# EAGLE board Thetis_RevE1_PCB (EAGLE 9.7.0)
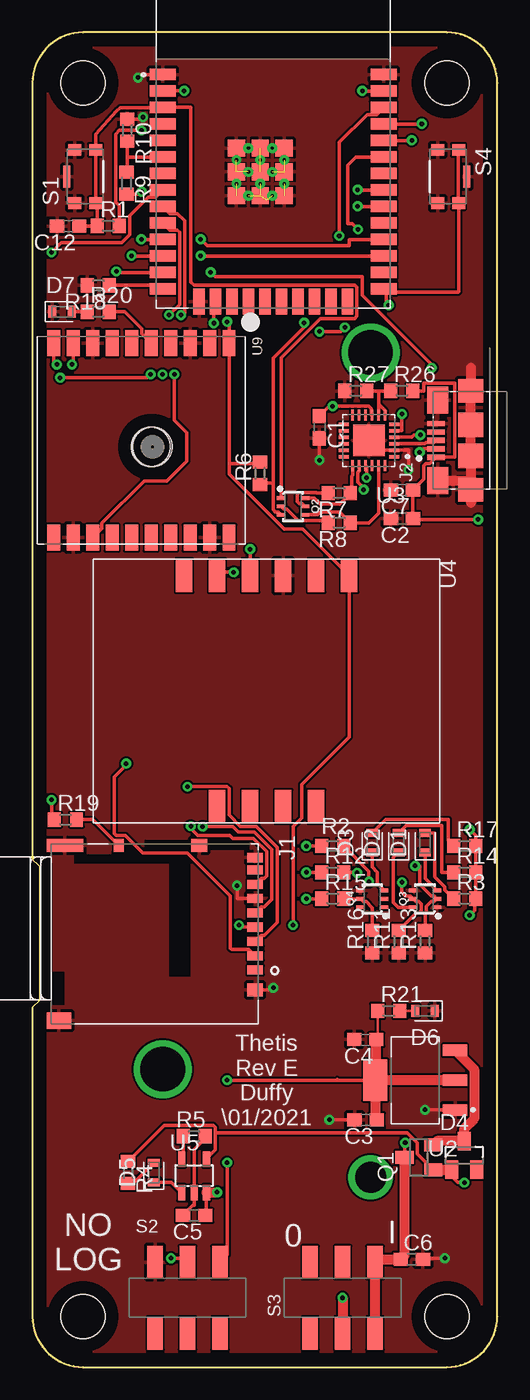
[diagram p0: board, top side]
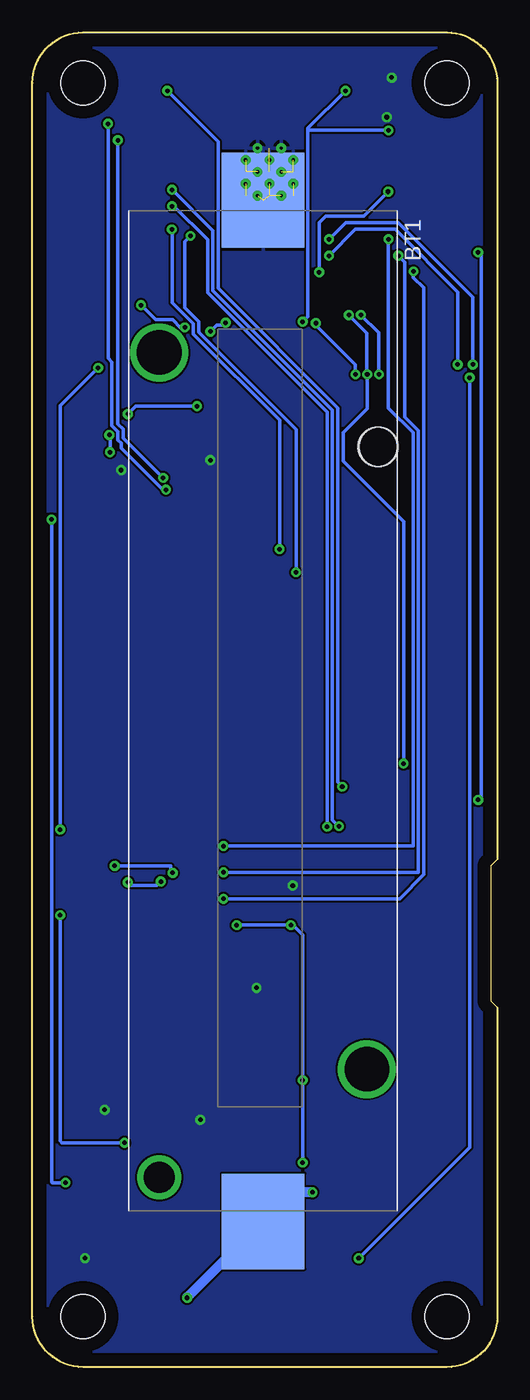
[diagram p1: board, bottom side, seen from below]

Size 35.79 x 102.79 mm. Coordinates in mm from the lower left corner, seen from the top.
Outline: 0,98.91 0,39.12 0.51,38.61 0.51,28.19 0,27.69 0,3.89 arc90 3.89,0 31.9,0 arc90 35.79,3.89 35.79,98.91 arc90 31.9,102.79 3.89,102.79 arc90 0,98.91
Copper layers (1*16): Top 0.035mm / dielectric 1.5mm / Bottom 0.035mm
Design rules "default": minimum track width 6mil, minimum drill 0.35mm, track to track 6mil, track to pad 6mil, pad to pad 6mil, via to via 6mil, smd to smd 6mil, copper to edge 40mil, drill to drill 6mil, minimum pad ring 10mil, minimum via ring 8mil, stop-mask expansion 4mil, vias tented up to drill 0mil, thermal gap 10mil
Net classes: 0 default: width 0.178 mm
Holes 3.4 mm at 3.89,3.89 31.9,3.89 3.89,98.91 31.9,98.91
Holes 3 mm at 9.12,70.87
tKeepout: area 28.7,0.7 to 35.1,7.1; area 0.7,0.7 to 7.1,7.1; area 0.7,95.7 to 7.1,102.1; area 28.7,95.7 to 35.1,102.1

## Footprints (pad centres in the part's own frame; a part is rotated, then mirrored left to right if it is on the bottom)
BAT_1042 = smd 7.35 x 6.35: + 39.33,0; - -39.33,0 | drill 3.45: P$1 -27.6,-8; P$2 27.6,8 | drill 2.39: P$3 35.93,-8
C0603 = smd 1.1 x 1: 1 -0.85,0; 2 0.85,0
LEDC1608X65N = smd 0.612 x 0.912: A 0.75,0; C -0.75,0
SOT23 = smd 1 x 1.4: 1 -0.95,-1.1; 2 0.95,-1.1; 3 0,1.1
LEDC1608X35N = smd 0.612 x 0.912: A 0.75,0; C -0.75,0
HRS_DM3AT-SF-PEJM5 = smd 0.7 x 1.2: 1 3.2,0; 2 2.1,0; 3 1,0; 4 -0.1,0; 5 -1.2,0; 6 -2.3,0; 7 -3.4,0; 8 -4.5,0; SWB -5.45,0 | smd 1 x 1.2: P1 -6.4,-4.3; P4 4.75,0 | smd 1 x 2.8: P2 -6.4,-14.65 | smd 1.3 x 1.9: P3 7.1,-15.1 | smd 1 x 0.8: SWA -6.4,-10.5
AMPHENOL_10118192-0001LF = smd 0.4 x 1.35: 1 -1.3,0; 2 -0.65,0; 3 0,0; 4 0.65,0; 5 1.3,0 | smd 2.1 x 1.6: SH1 -3.1,-0.125; SH2 3.1,-0.125 | smd 1.8 x 1.9: SH3 -3.8,-2.675; SH6 3.8,-2.675 | smd 1.9 x 1.9: SH4 -1.2,-2.675; SH5 1.2,-2.675
SC70-6 = smd 0.3 x 0.66: 1 -0.65,-0.92; 2 0,-0.92; 3 0.65,-0.92; 4 0.65,0.92; 5 0,0.92; 6 -0.65,0.92
R0603 = smd 1 x 1.1: 1 -0.85,0; 2 0.85,0
SW_KMR221GLFS = smd 0.9 x 1: 1 -2.05,0.8; 2 -2.05,-0.8; 3 2.05,-0.8; 4 2.05,0.8 | smd 1.7 x 0.55: 5 0,1.425
SW_JS202011SCQN = smd 1.2 x 2.5: 1 -2.5,-2.75; 2 0,-2.75; 3 2.5,-2.75; 4 -2.5,2.75; 5 0,2.75; 6 2.5,2.75
MODULE_ESP32-WROOM-32E_(16MB) = smd 2 x 0.9: 1 -8.5,5.26; 2 -8.5,3.99; 3 -8.5,2.72; 4 -8.5,1.45; 5 -8.5,0.18; 6 -8.5,-1.09; 7 -8.5,-2.36; 8 -8.5,-3.63; 9 -8.5,-4.9; 10 -8.5,-6.17; 11 -8.5,-7.44; 12 -8.5,-8.71; 13 -8.5,-9.98; 14 -8.5,-11.25; 25 8.5,-11.25; 26 8.5,-9.98; 27 8.5,-8.71; 28 8.5,-7.44; 29 8.5,-6.17; 30 8.5,-4.9; 31 8.5,-3.63; 32 8.5,-2.36; 33 8.5,-1.09; 34 8.5,0.18; 35 8.5,1.45; 36 8.5,2.72; 37 8.5,3.99; 38 8.5,5.26 | smd 0.9 x 2: 15 -5.715,-12.25; 16 -4.445,-12.25; 17 -3.175,-12.25; 18 -1.905,-12.25; 19 -0.635,-12.25; 20 0.635,-12.25; 21 1.905,-12.25; 22 3.175,-12.25; 23 4.445,-12.25; 24 5.715,-12.25 | smd 1.33 x 1.33: 39_1 -2.835,-0.405; 39_2 -1,-0.405; 39_3 0.835,-0.405; 39_4 -2.835,-2.24; 39_5 -1,-2.24; 39_6 0.835,-2.24; 39_7 -2.835,-4.075; 39_8 -1,-4.075; 39_9 0.835,-4.075 | drill 0.25 pad 0.3: 39_10 -1.917,-0.405; 39_11 -0.083,-0.405; 39_12 -2.835,-1.323; 39_13 -1,-1.323; 39_14 0.835,-1.323; 39_15 -1.917,-2.24; 39_16 -0.083,-2.24; 39_17 -2.835,-3.158; 39_18 -1,-3.158; 39_19 0.835,-3.158; 39_20 -1.917,-4.075; 39_21 -0.083,-4.075
SOT230P700X180-4N = smd 1.86 x 0.9: 1 -3.075,2.3; 2 -3.075,0; 3 -3.075,-2.3 | smd 1.86 x 3.19: 4 3.075,0
QFN50P400X400X80-25N = smd 0.84 x 0.26: 1 -1.935,1.25; 2 -1.935,0.75; 3 -1.935,0.25; 4 -1.935,-0.25; 5 -1.935,-0.75; 6 -1.935,-1.25; 13 1.935,-1.25; 14 1.935,-0.75; 15 1.935,-0.25; 16 1.935,0.25; 17 1.935,0.75; 18 1.935,1.25 | smd 0.26 x 0.84: 7 -1.25,-1.935; 8 -0.75,-1.935; 9 -0.25,-1.935; 10 0.25,-1.935; 11 0.75,-1.935; 12 1.25,-1.935; 19 1.25,1.935; 20 0.75,1.935; 21 0.25,1.935; 22 -0.25,1.935; 23 -0.75,1.935; 24 -1.25,1.935 | smd 2.45 x 2.45: 25 0,0
ADAFRUIT-BNO055-BREAKOUT-SMD = smd 2.54 x 1.27: P$1 -8.89,6.35; P$2 -8.89,3.81; P$3 -8.89,1.27; P$4 -8.89,-1.27; P$5 -8.89,-3.81; P$6 -8.89,-6.35; P$7 8.89,3.81; P$8 8.89,1.27; P$9 8.89,-1.27; P$10 8.89,-3.81
SOT23-5L = smd 0.55 x 1.2: 1 -0.95,-1.3; 2 0,-1.3; 3 0.95,-1.3; 4 0.95,1.3; 5 -0.95,1.3
FGPMMOPA6H = smd 2 x 1: P$1 -7.5,6.75; P$2 -7.5,5.25; P$3 -7.5,3.75; P$4 -7.5,2.25; P$5 -7.5,0.75; P$6 -7.5,-0.75; P$7 -7.5,-2.25; P$8 -7.5,-3.75; P$9 -7.5,-5.25; P$10 -7.5,-6.75; P$11 7.5,-6.75; P$12 7.5,-5.25; P$13 7.5,-3.75; P$14 7.5,-2.25; P$15 7.5,-0.75; P$16 7.5,0.75; P$17 7.5,2.25; P$18 7.5,3.75; P$19 7.5,5.25; P$20 7.5,6.75 | hole 3: 0.5,0.85

## Placement (x,y rotation side)
BT1  1042  [BAT_1042]  18.03,50.55 270 bottom
C1  1 uF  [C0603]  22.1,72.39 270 top
C2  1 uF  [C0603]  28.45,65.35 180 top
C3  10 uF  [C0603]  25.65,19.05 180 top
C4  10 uF  [C0603]  25.62,25.22 180 top
C5  10 uF  [C0603]  12.45,11.68 180 top
C6  10 uF  [C0603]  29.21,8.31 0 top
C7  1 uF  [C0603]  28.45,67.56 180 top
C12  10 uF  [C0603]  2.75,87.88 180 top
D1  GRN  [LEDC1608X65N]  30.23,40.39 90 top
D2  GRN  [LEDC1608X65N]  28.19,40.39 90 top
D3  GRN  [LEDC1608X65N]  26.16,40.39 90 top
D4  BAT400  [SOT23]  33.25,16.31 0 top
D5  ORG  [LEDC1608X65N]  9.35,14.99 90 top
D6  RED  [LEDC1608X65N]  30.23,27.43 180 top
D7  RED  [LEDC1608X35N]  2.29,81.28 0 top
J1  DM3AT-SF-PEJM5  [HRS_DM3AT-SF-PEJM5]  17.14,33.78 270 top
J2  10118192-0001LF  [AMPHENOL_10118192-0001LF]  31.07,71.37 90 top
Q1  DMG3414U-7  [SOT23]  29.75,16.15 90 top
Q2  MMBT2222N  [SC70-6]  20.07,66.29 270 top
Q3  MMBT2222N  [SC70-6]  30.23,36.07 90 top
Q4  MMBT2222N  [SC70-6]  26.16,36.07 90 top
R1  10k  [R0603]  5.84,87.88 0 top
R2  1k  [R0603]  23.11,40.13 0 top
R3  1k  [R0603]  33.27,36.07 0 top
R4  1k  [R0603]  7.37,14.99 270 top
R5  10.2k  [R0603]  12.45,17.78 0 top
R6  10k  [R0603]  17.53,68.83 90 top
R7  10k  [R0603]  23.62,67.31 180 top
R8  10k  [R0603]  23.62,65.02 180 top
R9  10k  [R0603]  7.25,91.19 270 top
R10  10k  [R0603]  7.29,95.25 270 top
R11  10k  [R0603]  28.19,32.77 90 top
R12  1k  [R0603]  23.11,38.1 0 top
R13  10k  [R0603]  30.23,32.77 90 top
R14  1k  [R0603]  33.27,38.1 0 top
R15  1k  [R0603]  23.11,36.07 0 top
R16  10k  [R0603]  26.16,32.77 90 top
R17  1k  [R0603]  33.27,40.13 0 top
R18  10k  [R0603]  5.08,83.31 180 top
R19  10k  [R0603]  2.54,42.16 0 top
R20  1k  [R0603]  5.08,81.28 0 top
R21  1k  [R0603]  27.43,27.43 0 top
R26  22.1k  [R0603]  28.45,75.18 0 top
R27  47.5k  [R0603]  24.89,75.18 0 top
S1  KMR221GLFS  [SW_KMR221GLFS]  4.06,91.69 90 top
S2  JS202011SCQN  [SW_JS202011SCQN]  11.94,5.33 0 top
S3  JS202011SCQN  [SW_JS202011SCQN]  23.88,5.33 0 top
S4  KMR221GLFS  [SW_KMR221GLFS]  32,91.69 270 top
U1  ESP32-WROOM-32E_(16MB)  [MODULE_ESP32-WROOM-32E_(16MB)]  18.54,94.29 0 top
U2  AZ1117H-3.3TRE1  [SOT230P700X180-4N]  29.46,22.1 180 top
U3  CP2102N-A02-GQFN24R  [QFN50P400X400X80-25N]  25.91,71.37 180 top
U4  BNO055 Breakout  [ADAFRUIT-BNO055-BREAKOUT-SMD]  18.03,52.07 270 top
U5  MCP73831/OT  [SOT23-5L]  12.45,14.73 0 top
U9  [FGPMMOPA6H]  8.38,71.37 270 top

## Library data of the parts
BT1 = 1042; MANUFACTURER: KEYSTONE
C1-C7 C12 = rcl; SPICEPREFIX: C
D1-D3 D5 D6 = LED; CATEGORY: LED; COLOR: GREEN; DESCRIPTION: CHIP LED ROUND; SUB-CATEGORY: CHIP; TYPE: ROUND_TOP
D4 = diode
D7 = LED; CATEGORY: LED; COLOR: YELLOW; DESCRIPTION: CHIP LED FLAT; SUB-CATEGORY: CHIP; TYPE: FLAT_TOP
J1 = DM3AT-SF-PEJM5; AVAILABILITY: Unavailable; DESCRIPTION: DM3 RA SMT microSD memory card push/push; MF: Hirose; MP: DM3AT-SF-PEJM5; PACKAGE: None; PRICE: None
J2 = MicroUSB; MANUFACTURER: Amphenol; PARTREV: B; STANDARD: Manufacturer Recommendation
Q1 = Transistor; CATEGORY: Transistor; SUB-CATEGORY: MOSFET; TYPE: N-Channel
Q2-Q4 = SparkFun-DiscreteSemi-Poseidon-Edit; PROD_ID: TRANS-13337
R1-R21 R26 R27 = rcl; SPICEPREFIX: R
S1 S4 = KMR221GLFS; MANUFACTURER: CnK
S2 S3 = JS202011SCQN; MANUFACTURER: C&K
U1 = ESP32-WROOM-32E; MANUFACTURER: Espressif Systems; MAXIMUM_PACKAGE_HEIGHT: 3.25mm; PARTREV: 1.1; STANDARD: Manufacturer Recommendations
U2 = AZ1117EH-5.0TRG1; ARROW_ELECTRONICS-PURCHASE-URL: https://snapeda.com/shop?store=Arrow+Electronics&id=482930; AVAILABILITY: Good; DESCRIPTION: Linear Voltage Regulator IC 1 Output 1A SOT-223; DIGIKEY-PURCHASE-URL: https://snapeda.com/shop?store=DigiKey&id=482930; MF: Diodes Inc.; MOUSER-PURCHASE-URL: https://snapeda.com/shop?store=Mouser&id=482930; MP: AZ1117EH-5.0TRG1; PACKAGE: SOT-223 Diodes Inc.; PRICE: None
U3 = CP2102N-A02-GQFN24R; A_MAX: 0.8; B_MAX: 0.3; B_MIN: 0.18; B_NOM: 0.24; D2_NOM: 2.45; D_MAX: 4.0; D_MIN: 4.0; D_NOM: 4.0; E2_NOM: 2.45; ENOM: 0.5; E_MAX: 4.0; E_MIN: 4.0; E_NOM: 4.0; L_MAX: 0.5; L_MIN: 0.3; L_NOM: 0.4; MANUFACTURER: Silicon Labs; PARTREV: 1.3; PIN_COUNT_D: 6.0; PIN_COUNT_E: 6.0; STANDARD: IPC 7351B
U4 = EVE-ECAD-Library
U5 U9 = adafruit - EVE Edit

## Nets
3.3V: C3.1 C4.1 J1.4 R1.2 R6.2 R21.1 S2.6 U1.2 U2.2 U2.4 U4.P$1 U9.P$1
3V3: U4.P$2
!DTR: Q2.4 R8.1 U3.23
!RTS: Q2.6 R7.1 U3.19
ACAL_LED: R12.1 U1.12
BATT_MON: R9.1 R10.2 U1.6
D+: J2.3 U3.3
D-: J2.2 U3.4
ESP_RX0: U1.34 U3.21
ESP_RX1: U1.27 U9.P$9
ESP_TX0: U1.35 U3.20
ESP_TX1: U1.28 U9.P$10
GCAL_LED: R2.1 U1.11
GND: BT1.- C1.2 C2.2 C3.2 C4.2 C6.2 C7.2 C12.2 D6.C D7.C J1.6 J1.P1 J1.P2 J1.P3 J1.P4 J1.SWB J2.5 J2.SH1 J2.SH2 J2.SH3 J2.SH4 J2.SH5 J2.SH6 Q3.1 Q3.4 Q4.4 R10.1 R11.1 R13.1 R16.1 R18.2 R27.1 S1.1 S1.4 S1.5 S2.4 S4.2 S4.3 S4.5 U1.1 U1.15 U1.38 U1.39_1 U1.39_2 U1.39_3 U1.39_4 U1.39_5 U1.39_6 U1.39_7 U1.39_8 U1.39_9 U1.39_10 U1.39_11 U1.39_12 U1.39_13 U1.39_14 U1.39_15 U1.39_16 U1.39_17 U1.39_18 U1.39_19 U1.39_20 U1.39_21 U2.1 U3.2 U3.25 U4.P$3 U9.P$3 U9.P$8 U9.P$12 U9.P$19
GPS_PPS: U1.16 U9.P$13
IO0: Q2.3 R6.1 S4.1 S4.4 U1.25
LOG_SELECT: S2.5 U1.10
MCAL_LED: R15.1 U1.13
MISO: J1.7 U1.31
MOSI: J1.3 U1.37
N$1: BT1.+ C5.1 S3.2 U5.3
N$2: D7.A R20.1
N$3: R20.2 U9.P$5
N$4: C5.2 R5.2 U5.2
N$5: R18.1 U1.14
N$6: Q3.5 R2.2 R11.2
N$7: Q2.2 R8.2
N$8: D1.C Q3.3
N$9: Q2.5 R7.2
N$10: D1.A R3.1
N$11: D2.A R14.1
N$12: D2.C Q3.6
N$13: D4.3 Q1.2 U2.3
N$14: Q3.2 R12.2 R13.2
N$15: Q4.5 R15.2 R16.2
N$16: D3.C Q4.3
N$17: D3.A R17.1
N$18: C1.1 U3.5 U3.6 U3.9
N$19: R26.1 R27.2 U3.7 U3.8
N$20: D5.A R4.2
N$21: D5.C U5.1
N$22: R5.1 U5.5
N$23: J1.SWA R19.2
N$24: D6.A R21.2
RST: C12.1 Q2.1 R1.1 S1.2 S1.3 U1.3
SCK: J1.5 U1.30
SCL: U1.36 U4.P$5
SD_CD: R19.1 U1.8
SD_CS: J1.2 U1.9
SDA: U1.33 U4.P$4
V_BATT: C6.1 Q1.3 R3.2 R9.2 R14.2 R17.2 S3.3 S3.6
V_USB: C2.1 C7.1 D4.1 J2.1 Q1.1 R4.1 R26.2 U5.4

## Tracks (layer width: path | path; a pad name or v marks a point on that pad's centre or on a via)
3.3V  (via drill 0.35)
  Top 0.178: 23.46,22.19 23.37,22.1 | R21.1 26.58,25.33 C4.1
  Top 0.254: U2.4 23.37,22.1 v14.99,22.1 | v14.99,15.75 14.99,8.63 S2.6 | U1.2 10.06,98.3 v11.68,98.3 | v14.99,80.51 15.13,80.37 U9.P$1 15.13,69.6 | 15.13,69.6 15.13,68.78 19.37,64.54 20.8,64.54 U4.P$1 24.38,48.51 20.73,44.86 20.73,42.3 20.07,41.64 v20.07,34.04 | R1.2 6.69,89.45 6.42,89.72 6.42,94.97 6.69,95.25 v8.38,95.25 | R6.2 17.44,69.6 15.13,69.6 | J1.4 16.05,33.88 v15.9,34.04
  Top 0.762: U2.2 U2.4 | U2.4 26.47,22.18 C4.1 | U2.4 26.39,19.16 C3.1
  Bottom 0.254: v14.99,15.75 v14.99,22.1 14.99,33.27 15.75,34.04 v15.9,34.04 v20.07,34.04 | 14.58,95.25 14.58,95.4 v11.68,98.3 | 14.58,95.25 14.58,80.92 v14.99,80.51 | v8.38,95.25 14.58,95.25
!DTR
  Top 0.254: Q2.4 21.95,65.64 22.16,65.85 23.64,65.85 R8.1 25.91,65.02 26.66,65.77 U3.23
!RTS
  Top 0.254: Q2.6 21.69,66.94 22.16,66.48 23.64,66.48 R7.1 24.58,67.42 24.58,68.62 24.66,68.69 U3.19
ACAL_LED  (via drill 0.35)
  Top 0.254: R12.1 v21.08,38.1 | U1.12 7.64,85.58 v7.62,85.6
  Bottom 0.254: v7.62,85.6 7.11,85.09 7.11,73.18 6.07,72.14 6.07,38.1 v21.08,38.1
BATT_MON
  Top 0.254: R10.2 7.29,93.22 | 7.29,93.22 7.29,92.08 R9.1 | U1.6 7.3,93.2 7.29,93.22
D+
  Top 0.254: J2.3 30.9,71.2 30.28,71.2 30.21,71.13 29.05,71.13 29.05,71.12 U3.3
D-  (via drill 0.35)
  Top 0.254: U3.4 29.21,71.62 29.37,71.79 v29.87,71.79 | v29.81,70.47 30.07,70.72 J2.2
  Bottom 0.254: v29.81,70.47 29.81,71.43 29.87,71.48 v29.87,71.79
ESP_RX0  (via drill 0.35)
  Top 0.254: U3.21 25.75,69.35 25.75,68.52 v25.72,68.49 | v29.21,94.49 29.19,94.47 U1.34
  Bottom 0.254: v25.72,68.49 28.8,71.57 28.8,72.23 29.21,72.64 v29.21,94.49
ESP_RX1  (via drill 0.35)
  Top 0.254: U9.P$9 3.13,77.3 v3.05,77.22 | U1.27 12.97,85.58 v12.95,85.6
  Bottom 0.254: v12.95,85.6 10.92,87.63 7.87,87.63 3.05,82.8 v3.05,77.22
ESP_TX0  (via drill 0.35)
  Top 0.254: v25.5,67.58 25.5,67.72 25.06,68.16 25.06,68.92 25.16,69.01 U3.20 | v29.97,95.76 29.96,95.74 U1.35
  Bottom 0.254: v25.5,67.58 25.74,67.58 28.96,70.79 28.96,71.15 29.21,71.4 29.21,72.06 29.67,72.52 29.67,77.4 29.97,77.7 v29.97,95.76
ESP_TX1  (via drill 0.35)
  Top 0.254: v12.95,86.87 13.46,86.36 24.38,86.36 24.38,86.85 U1.28 | v1.88,77.22 1.63,77.46 U9.P$10
  Bottom 0.254: v12.95,86.87 11.68,88.14 7.62,88.14 1.88,82.39 v1.88,77.22
GCAL_LED  (via drill 0.35)
  Top 0.254: v21.08,40.13 R2.1 | U1.11 8.4,86.85 v8.38,86.87
  Bottom 0.254: v8.38,86.87 8.38,73.88 6.47,71.97 6.47,40.13 v21.08,40.13
GND  (via drill 0.35)  (12 unrouted)
  Top 0.254: U3.25 25.91,70.62 U3.2 28.96,70.62 v28.96,69.09 | C1.2 v22.1,69.85 | U1.1 8.13,99.55 v8.13,99.31 | R10.1 8.51,96.1 v8.51,96.27 | J1.6 15.75,36.08 v15.75,37.08 | J1.P4 18.54,29.03 v18.54,29.21 | U2.1 30.23,19.8 v30.23,19.81 | C3.2 v22.86,19.05 | C6.2 30.06,8.38 v31.75,8.38
  Top 0.762: 33.75,68.27 J2.SH4 J2.SH5 J2.SH6 33.78,75.17 33.78,76.96 | 33.75,68.27 J2.SH3 33.78,67.57 33.78,66.55 | J2.SH1 33.75,68.27
  pour Top: -5.21,-5.71 38.48,-5.71 38.48,111.12 -5.21,111.12
  pour Bottom: -5.21,-5.71 38.48,-5.71 38.48,111.12 -5.21,111.12
GPS_PPS  (via drill 0.35)
  Top 0.254: U9.P$13 5.35,64.59 5.35,64.99 8.59,68.23 10.33,68.23 11.88,69.78 11.88,71.97 10.92,72.92 v10.92,76.45 | U1.16 13.97,81.91 v13.97,80.41
  Bottom 0.254: v10.92,76.45 10.92,77.22 13.97,80.26 v13.97,80.41
IO0  (via drill 0.35)
  Top 0.254: S4.1 32.77,93.68 32.77,89.58 S4.4 32.8,82.84 32.77,82.8 27.28,82.8 27.23,82.86 | 27.23,82.86 U1.25 | Q2.3 18.92,65.86 18.7,65.86 18.54,66.03 18.54,68.07 | 18.54,68.07 18.54,77.72 20.91,80.1 v20.91,80.43 | v22.1,79.76 23.73,79.76 v24.05,80.08 | v27.43,81.79 27.23,81.99 27.23,82.86 | R6.1 17.61,68.07 18.54,68.07
  Bottom 0.254: v22.1,79.76 21.59,80.26 21.08,80.26 v20.91,80.43 | v24.05,80.08 24.41,80.08 24.99,80.66 26.3,80.66 v27.43,81.79
LOG_SELECT  (via drill 0.35)
  Top 0.254: v10.51,81.04 | v10.51,81.04 11.32,81.85 11.32,87.42 11.16,87.58 10.58,87.58 U1.10 | v10.67,8.38 11.64,8.38 S2.5 | v9.1,76.45 8.85,76.2 v2.13,76.2
  Bottom 0.254: v10.51,81.04 9.14,79.67 9.14,76.49 v9.1,76.45 | v10.67,8.38 2.13,16.92 v2.13,76.2
MCAL_LED  (via drill 0.35)
  Top 0.254: R15.1 v21.08,36.07 | U1.13 6.53,84.31 v6.45,84.39
  Bottom 0.254: v6.45,84.39 6.45,83.92 5.66,83.13 5.66,37.93 7.52,36.07 17.02,36.07 v21.08,36.07
MISO  (via drill 0.35)
  Top 0.254: J1.7 17.61,37.65 17.86,37.65 18.02,37.82 18.02,39.7 17,40.72 15.41,40.72 15.17,40.96 12.72,40.96 12.11,41.57 v12.19,41.66 | U1.31 25.06,90.66 v25.04,90.68
  Bottom 0.254: v12.19,41.66 12.69,42.15 12.69,73.71 21.89,82.92 21.89,87.53 v25.04,90.68
MOSI  (via drill 0.35)
  Top 0.254: J1.3 17.61,33.25 17.86,33.25 18.83,34.23 18.83,40.03 17.24,41.63 16.01,41.63 15.14,42.51 15.14,44.57 14.97,44.73 11.96,44.73 v11.94,44.7 | U1.37 25.42,98.28 v25.4,98.3
  Bottom 0.254: v25.4,98.3 21.49,94.39 21.49,83.09 12.28,73.88 12.28,45.05 v11.94,44.7
N$1  (via drill 0.35)
  Top 0.254: C5.1 13.4,11.78 U5.3
  Top 0.762: v23.88,5.33 S3.2 | U5.3 13.43,13.46 v14.22,13.46
  Bottom 0.762: v23.88,5.33 23.88,5.37 BT1.+ 15.79,13.46 v14.22,13.46
N$2
  Top 0.254: D7.A R20.1
N$3
  Top 0.254: U9.P$5 8.41,79.59 8.41,79.99 7.12,81.28 R20.2
N$4
  Top 0.254: R5.2 13.3,17.61 12.45,16.76 U5.2 12.45,12.45 12.36,12.45 C5.2
N$5
  Top 0.254: R18.1 9.77,83.31 U1.14
N$6  (via drill 0.35)
  Top 0.254: R11.2 29.57,34.99 29.75,34.99 29.91,35.15 29.91,35.68 29.75,35.85 29.53,35.85 Q3.5 29.09,36.29 28.7,36.29 28.45,36.54 v28.45,37.34 | R2.2 25.91,38.19 v25.91,37.4
  Bottom 0.254: v28.45,37.34 28.19,37.08 26.22,37.08 v25.91,37.4
N$7
  Top 0.254: R8.2 22.58,65.22 20.45,65.22 19.59,66.07 19.37,66.07 Q2.2
N$8
  Top 0.254: Q3.3 30.23,37.64 D1.C
N$9
  Top 0.254: Q2.5 20.77,66.52 20.54,66.52 20.38,66.68 20.38,67.21 20.54,67.37 21.84,67.37 21.9,67.31 R7.2
N$10
  Top 0.254: R3.1 31.75,36.74 31.75,36.98 30.99,37.75 30.99,41.15 30.24,41.15 D1.A
N$11
  Top 0.254: R14.1 31.5,38.1 31.5,41.72 28.78,41.72 D2.A
N$12
  Top 0.254: Q3.6 28.98,35.42 28.97,35.41 28.18,35.41 27.79,35.8 27.79,39.23 D2.C
N$13
  Top 0.762: Q1.2 31.15,17.41 D4.3 33.25,18.37 34,19.13 34,22.93 U2.3
N$14  (via drill 0.35)
  Top 0.254: R13.2 30.23,34.89 30.32,34.98 30.32,35.47 30.7,35.85 30.92,35.85 Q3.2 30.92,36.29 30.7,36.29 29.82,37.17 29.82,38.61 v29.46,38.61 | R12.2 24.96,38.1 v25,38.06
  Bottom 0.254: v25,38.06 25.11,38.06 25.15,38.1 25.15,38.61 v29.46,38.61
N$15
  Top 0.254: R15.2 Q4.5 25.46,35.85 25.69,35.85 26.16,35.37 R16.2
N$16
  Top 0.254: D3.C 26.16,38.51 26.57,38.11 26.57,37.23 Q4.3
N$17
  Top 0.254: R17.1 32,40.55 32,42.16 27.19,42.16 D3.A
N$18  (via drill 0.35)
  Top 0.254: U3.6 27.86,72.64 28.45,72.64 | 28.45,72.64 28.45,72.14 28.44,72.12 U3.5 | C1.1 22.87,74.01 v23.11,74.01 25.88,74.01 26.07,73.83 26.07,73.31 U3.9 | v28.45,73.41 28.45,72.64
  Bottom 0.254: v23.11,74.01 27.85,74.01 v28.45,73.41
N$19
  Top 0.254: 26.67,75.18 R27.2 | 26.67,75.18 R26.1 | U3.8 26.67,73.32 26.67,74.17 | 26.67,74.17 26.67,75.18 | U3.7 27.16,73.68 26.67,74.17
N$20
  Top 0.254: D5.A 7.75,14.14 R4.2
N$21
  Top 0.254: D5.C 10.69,14.24 U5.1
N$22
  Top 0.254: R5.1 11.6,16.13 U5.5
N$23
  Top 0.254: J1.SWA 4.66,42.16 R19.2
N$24
  Top 0.178: R21.2 D6.A
RST
  Top 0.254: C12.1 R1.1 4.99,89.34 S1.2 S1.3 4.86,94.94 6.46,96.72 6.76,97.01 U1.3 10.06,97.03 12.19,97.03 12.19,83.58 12.45,83.32 24.82,83.32 24.99,83.16 24.99,80.93 24.82,80.76 22.17,80.76 19.15,77.73 Q2.1
SCK  (via drill 0.35)
  Top 0.254: J1.5 17.61,35.45 17.86,35.45 18.43,36.02 18.43,39.87 17.07,41.22 15.84,41.22 15.44,41.63 v13.11,41.63 v13.1,41.62 | U1.30 25.06,89.39 v25.04,89.41
  Bottom 0.254: v13.1,41.62 v13.09,41.63 13.09,73.54 22.3,82.75 22.3,86.82 24.89,89.41 v25.04,89.41
SCL  (via drill 0.35)
  Top 0.254: U1.36 26.5,96.47 25.76,96.47 23.62,94.33 v23.62,87.12 | U4.P$5 14.48,61.21 v15.49,61.21
  Bottom 0.254: v23.62,87.12 24.08,86.67 24.08,81.6 22.99,80.52 22.99,79.72 15.49,72.22 v15.49,61.21
SD_CD  (via drill 0.35)
  Top 0.254: U1.8 9.5,90.12 8.93,90.12 7.47,88.67 7.47,87.22 6.87,86.61 2.23,86.61 v1.47,85.85 | v1.47,43.69 1.47,42.38 R19.1
  Bottom 0.254: v1.47,85.85 1.22,85.6 1.22,43.94 v1.47,43.69
SD_CS  (via drill 0.35)
  Top 0.254: U1.9 10.58,88.85 11.16,88.85 11.73,88.28 11.73,81.17 11.58,81.03 v11.43,81.03 | J1.2 16.67,32.15 15.34,32.15 15.24,32.26 15.24,36.29 11.91,39.62 8.5,39.62 7.16,40.96 6.44,40.96 6.3,41.1 6.3,45.44 7.22,46.35 v7.22,46.48
  Bottom 0.254: v11.43,81.03 10.05,79.65 10.05,76.49 v10.01,76.45 10.01,73.83 11.88,71.97 11.88,69.78 7.21,65.12 7.21,46.62 7.22,46.62 v7.22,46.48
SDA  (via drill 0.35)
  Top 0.254: U1.33 24.91,93.2 24.28,92.58 24.28,88.05 24.64,88.05 v25.06,87.63 | v16.76,62.99 U4.P$4
  Bottom 0.254: v25.06,87.63 25.04,87.61 25.04,81.99 23.4,80.35 23.4,79.55 16.76,72.92 v16.76,62.99
V_BATT  (via drill 0.35)
  Top 0.254: Q1.3 28.65,17.22 v28.7,17.27 | R9.2 8.21,90.34 v8.4,90.53 | v30.73,76.96 30.73,77.22 25.39,82.56 25.39,83.97 14.07,83.97 v13.72,84.33 | v33.66,34.8 34.04,35.17 34.04,35.98 R3.2 R14.2 R17.2 34.12,40.94 v33.66,41.4
  Top 0.762: S3.3 S3.6 26.6,8.31 C6.1 28.65,8.59 Q1.3
  Bottom 0.254: v28.7,17.27 33.53,17.27 33.66,17.41 v33.66,34.8 | v8.4,90.53 10.29,88.65 13.21,88.65 13.72,88.14 v13.72,84.33 | v30.73,76.96 33.66,74.03 v33.66,41.4
V_USB  (via drill 0.35)
  Top 0.254: 31.75,15.21 32.73,14.22 33.23,14.22 v33.25,14.2 | 14.07,18.03 14.07,18.45 13.91,18.61 10.14,18.61 R4.1 | 14.07,18.03 14.07,16.71 U5.4 | Q1.1 29.63,16.42 29.63,17.28 28.87,18.03 14.07,18.03 | v34.32,65.28 29.37,65.28 C2.1 C7.1 30.12,68.38 30.12,69.44 30.28,69.6 30.6,69.6 J2.1 31.07,70.1 32.51,70.1 32.51,75.8 30.12,75.8 30.12,75.18 R26.2
  Top 0.762: Q1.1 31.75,15.21 D4.1
  Bottom 0.254: v33.25,14.2 34.27,14.2 34.32,14.25 v34.32,65.28

## Text on the board
tSilk: Thetis / Rev E / Duffy / \01/2021 | NO / LOG | 0 | I